# EAGLE board IOB-Adapter-Output_array (EAGLE 7.7.0)
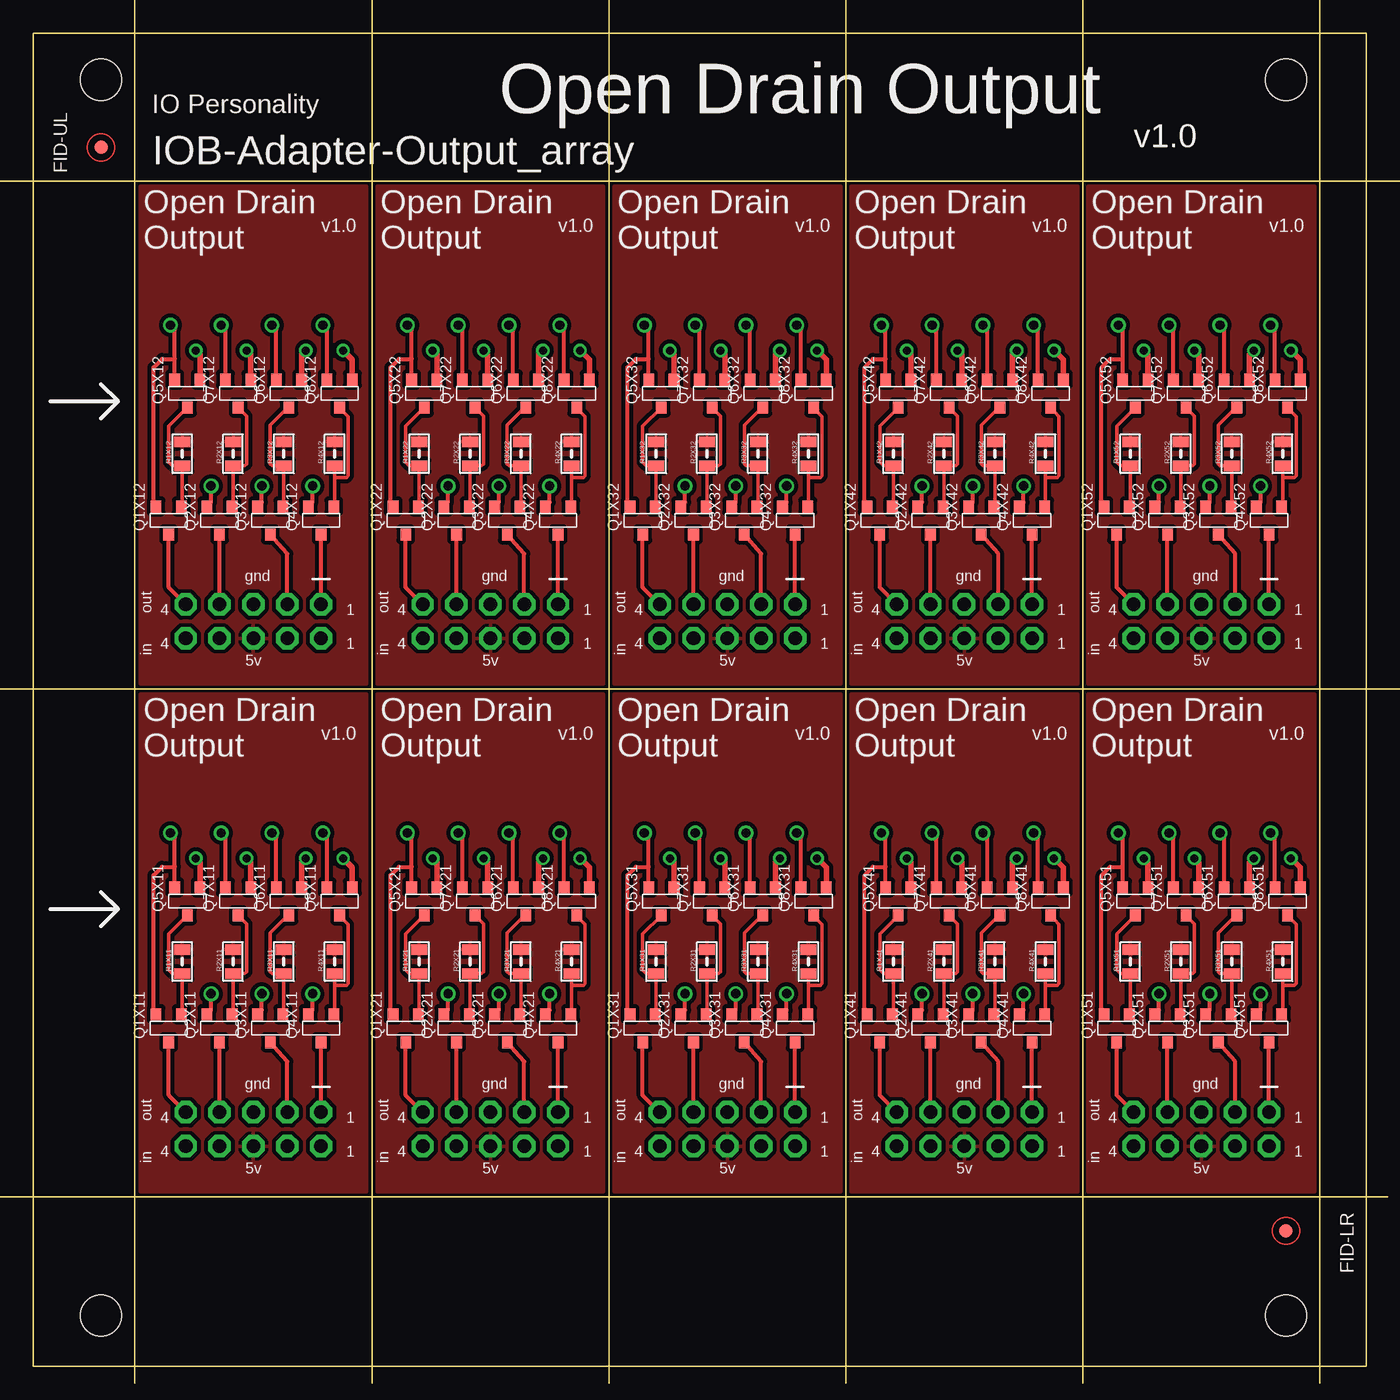
[diagram p0: board, top side]
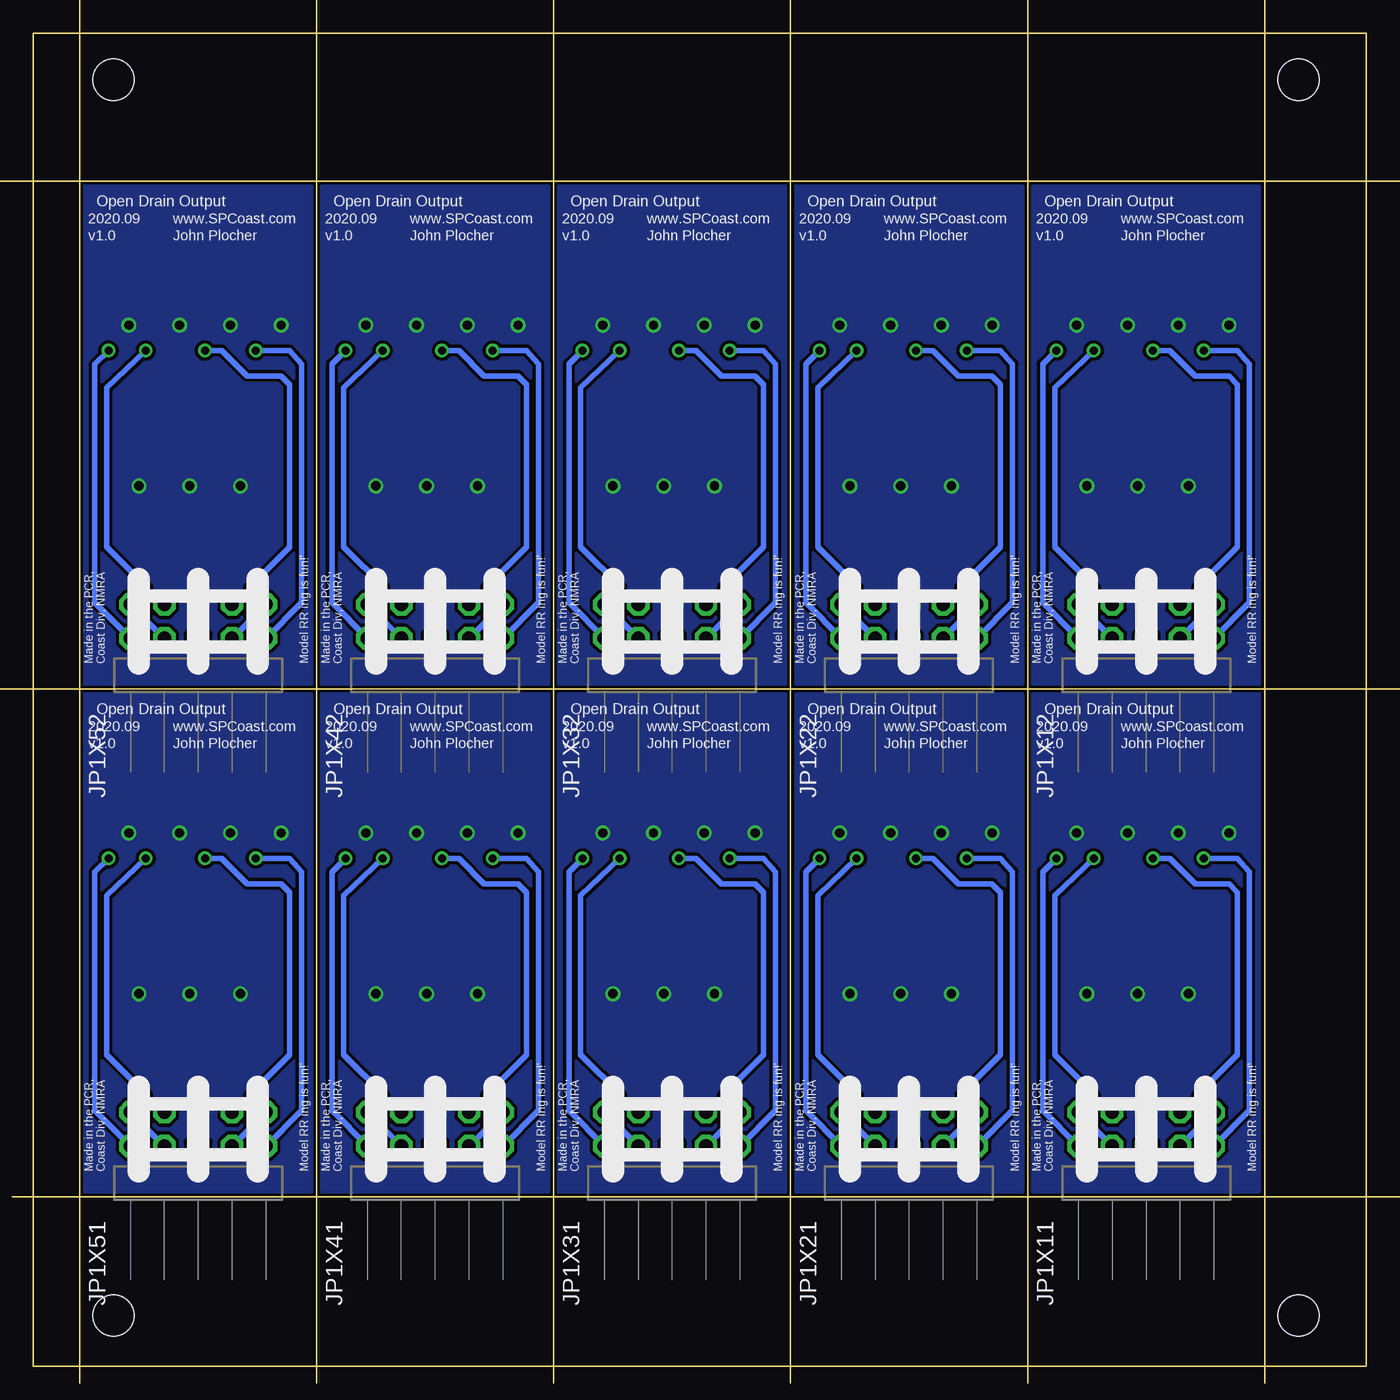
[diagram p1: board, bottom side, seen from below]

Size 100 x 100 mm. Coordinates in mm from the lower left corner, seen from the top.
Copper layers (1*16): Top 0.035mm / dielectric 1.5mm / Bottom 0.035mm
Design rules "default": minimum track width 10mil, minimum drill 0.6mm, track to track 8mil, track to pad 8mil, pad to pad 8mil, via to via 8mil, smd to smd 8mil, copper to edge 40mil, drill to drill 8mil, minimum pad ring 10mil, minimum via ring 8mil, stop-mask expansion 4mil, vias tented up to drill 0mil, thermal gap 10mil

## Footprints (pad centres in the part's own frame; a part is rotated, then mirrored left to right if it is on the bottom)
BOARD-DINRAIL-3.17IN-5X2-IOP = hole 3.1: 5.08,96.52; 93.98,96.52; 5.08,3.81; 93.98,3.81
FIDUCIAL_1MM = smd 1 x 1: 1 0,0
IOB-V3-MODULE = drill 1.016 pad 1.676 octagon: 1 -1.27,-5.08; 2 1.27,-5.08; 3 -1.27,-2.54; 4 1.27,-2.54; 5 -1.27,0; 6 1.27,0; 7 -1.27,2.54; 8 1.27,2.54; 9 -1.27,5.08; 10 1.27,5.08
SOT23-3 = smd 0.9 x 0.8: 1 1,-0.95; 2 1,0.95; 3 -1.1,0
0805-RES = smd 0.8 x 1.2: 1 -0.9,0; 2 0.9,0

## Placement (x,y rotation side)
CARRIER  BOARD  [BOARD-DINRAIL-3.17IN-5X2-IOP]  0,0 0 top
FID-LR  FIDUCIAL  [FIDUCIAL_1MM]  93.98,10.16 0 top
FID-UL  FIDUCIAL  [FIDUCIAL_1MM]  5.08,91.44 0 top
JP1X11  CONNECTOR-M05X2  [IOB-V3-MODULE]  16.51,17.78 270 bottom
JP1X12  CONNECTOR-M05X2  [IOB-V3-MODULE]  16.51,55.88 270 bottom
JP1X21  CONNECTOR-M05X2  [IOB-V3-MODULE]  34.29,17.78 270 bottom
JP1X22  CONNECTOR-M05X2  [IOB-V3-MODULE]  34.29,55.88 270 bottom
JP1X31  CONNECTOR-M05X2  [IOB-V3-MODULE]  52.07,17.78 270 bottom
JP1X32  CONNECTOR-M05X2  [IOB-V3-MODULE]  52.07,55.88 270 bottom
JP1X41  CONNECTOR-M05X2  [IOB-V3-MODULE]  69.85,17.78 270 bottom
JP1X42  CONNECTOR-M05X2  [IOB-V3-MODULE]  69.85,55.88 270 bottom
JP1X51  CONNECTOR-M05X2  [IOB-V3-MODULE]  87.63,17.78 270 bottom
JP1X52  CONNECTOR-M05X2  [IOB-V3-MODULE]  87.63,55.88 270 bottom
Q1X11  N-FET  [SOT23-3]  10.16,25.4 90 top
Q1X12  N-FET  [SOT23-3]  10.16,63.5 90 top
Q1X21  N-FET  [SOT23-3]  27.94,25.4 90 top
Q1X22  N-FET  [SOT23-3]  27.94,63.5 90 top
Q1X31  N-FET  [SOT23-3]  45.72,25.4 90 top
Q1X32  N-FET  [SOT23-3]  45.72,63.5 90 top
Q1X41  N-FET  [SOT23-3]  63.5,25.4 90 top
Q1X42  N-FET  [SOT23-3]  63.5,63.5 90 top
Q1X51  N-FET  [SOT23-3]  81.28,25.4 90 top
Q1X52  N-FET  [SOT23-3]  81.28,63.5 90 top
Q2X11  N-FET  [SOT23-3]  13.97,25.4 90 top
Q2X12  N-FET  [SOT23-3]  13.97,63.5 90 top
Q2X21  N-FET  [SOT23-3]  31.75,25.4 90 top
Q2X22  N-FET  [SOT23-3]  31.75,63.5 90 top
Q2X31  N-FET  [SOT23-3]  49.53,25.4 90 top
Q2X32  N-FET  [SOT23-3]  49.53,63.5 90 top
Q2X41  N-FET  [SOT23-3]  67.31,25.4 90 top
Q2X42  N-FET  [SOT23-3]  67.31,63.5 90 top
Q2X51  N-FET  [SOT23-3]  85.09,25.4 90 top
Q2X52  N-FET  [SOT23-3]  85.09,63.5 90 top
Q3X11  N-FET  [SOT23-3]  17.78,25.4 90 top
Q3X12  N-FET  [SOT23-3]  17.78,63.5 90 top
Q3X21  N-FET  [SOT23-3]  35.56,25.4 90 top
Q3X22  N-FET  [SOT23-3]  35.56,63.5 90 top
Q3X31  N-FET  [SOT23-3]  53.34,25.4 90 top
Q3X32  N-FET  [SOT23-3]  53.34,63.5 90 top
Q3X41  N-FET  [SOT23-3]  71.12,25.4 90 top
Q3X42  N-FET  [SOT23-3]  71.12,63.5 90 top
Q3X51  N-FET  [SOT23-3]  88.9,25.4 90 top
Q3X52  N-FET  [SOT23-3]  88.9,63.5 90 top
Q4X11  N-FET  [SOT23-3]  21.59,25.4 90 top
Q4X12  N-FET  [SOT23-3]  21.59,63.5 90 top
Q4X21  N-FET  [SOT23-3]  39.37,25.4 90 top
Q4X22  N-FET  [SOT23-3]  39.37,63.5 90 top
Q4X31  N-FET  [SOT23-3]  57.15,25.4 90 top
Q4X32  N-FET  [SOT23-3]  57.15,63.5 90 top
Q4X41  N-FET  [SOT23-3]  74.93,25.4 90 top
Q4X42  N-FET  [SOT23-3]  74.93,63.5 90 top
Q4X51  N-FET  [SOT23-3]  92.71,25.4 90 top
Q4X52  N-FET  [SOT23-3]  92.71,63.5 90 top
Q5X11  N-FET  [SOT23-3]  11.56,34.92 90 top
Q5X12  N-FET  [SOT23-3]  11.56,73.03 90 top
Q5X21  N-FET  [SOT23-3]  29.34,34.92 90 top
Q5X22  N-FET  [SOT23-3]  29.34,73.03 90 top
Q5X31  N-FET  [SOT23-3]  47.12,34.92 90 top
Q5X32  N-FET  [SOT23-3]  47.12,73.03 90 top
Q5X41  N-FET  [SOT23-3]  64.9,34.92 90 top
Q5X42  N-FET  [SOT23-3]  64.9,73.03 90 top
Q5X51  N-FET  [SOT23-3]  82.68,34.92 90 top
Q5X52  N-FET  [SOT23-3]  82.68,73.03 90 top
Q6X11  N-FET  [SOT23-3]  19.18,34.92 90 top
Q6X12  N-FET  [SOT23-3]  19.18,73.03 90 top
Q6X21  N-FET  [SOT23-3]  36.96,34.92 90 top
Q6X22  N-FET  [SOT23-3]  36.96,73.03 90 top
Q6X31  N-FET  [SOT23-3]  54.74,34.92 90 top
Q6X32  N-FET  [SOT23-3]  54.74,73.03 90 top
Q6X41  N-FET  [SOT23-3]  72.52,34.92 90 top
Q6X42  N-FET  [SOT23-3]  72.52,73.03 90 top
Q6X51  N-FET  [SOT23-3]  90.3,34.92 90 top
Q6X52  N-FET  [SOT23-3]  90.3,73.03 90 top
Q7X11  N-FET  [SOT23-3]  15.37,34.92 90 top
Q7X12  N-FET  [SOT23-3]  15.37,73.03 90 top
Q7X21  N-FET  [SOT23-3]  33.15,34.92 90 top
Q7X22  N-FET  [SOT23-3]  33.15,73.03 90 top
Q7X31  N-FET  [SOT23-3]  50.93,34.92 90 top
Q7X32  N-FET  [SOT23-3]  50.93,73.03 90 top
Q7X41  N-FET  [SOT23-3]  68.71,34.92 90 top
Q7X42  N-FET  [SOT23-3]  68.71,73.03 90 top
Q7X51  N-FET  [SOT23-3]  86.49,34.92 90 top
Q7X52  N-FET  [SOT23-3]  86.49,73.03 90 top
Q8X11  N-FET  [SOT23-3]  22.99,34.92 90 top
Q8X12  N-FET  [SOT23-3]  22.99,73.03 90 top
Q8X21  N-FET  [SOT23-3]  40.77,34.92 90 top
Q8X22  N-FET  [SOT23-3]  40.77,73.03 90 top
Q8X31  N-FET  [SOT23-3]  58.55,34.92 90 top
Q8X32  N-FET  [SOT23-3]  58.55,73.03 90 top
Q8X41  N-FET  [SOT23-3]  76.33,34.92 90 top
Q8X42  N-FET  [SOT23-3]  76.33,73.03 90 top
Q8X51  N-FET  [SOT23-3]  94.11,34.92 90 top
Q8X52  N-FET  [SOT23-3]  94.11,73.03 90 top
R1X11  10k  [0805-RES]  11.18,30.35 90 top
R1X12  10k  [0805-RES]  11.18,68.45 90 top
R1X21  10k  [0805-RES]  28.96,30.35 90 top
R1X22  10k  [0805-RES]  28.96,68.45 90 top
R1X31  10k  [0805-RES]  46.74,30.35 90 top
R1X32  10k  [0805-RES]  46.74,68.45 90 top
R1X41  10k  [0805-RES]  64.52,30.35 90 top
R1X42  10k  [0805-RES]  64.52,68.45 90 top
R1X51  10k  [0805-RES]  82.3,30.35 90 top
R1X52  10k  [0805-RES]  82.3,68.45 90 top
R2X11  10k  [0805-RES]  14.99,30.35 90 top
R2X12  10k  [0805-RES]  14.99,68.45 90 top
R2X21  10k  [0805-RES]  32.77,30.35 90 top
R2X22  10k  [0805-RES]  32.77,68.45 90 top
R2X31  10k  [0805-RES]  50.55,30.35 90 top
R2X32  10k  [0805-RES]  50.55,68.45 90 top
R2X41  10k  [0805-RES]  68.33,30.35 90 top
R2X42  10k  [0805-RES]  68.33,68.45 90 top
R2X51  10k  [0805-RES]  86.11,30.35 90 top
R2X52  10k  [0805-RES]  86.11,68.45 90 top
R3X11  10k  [0805-RES]  18.8,30.35 90 top
R3X12  10k  [0805-RES]  18.8,68.45 90 top
R3X21  10k  [0805-RES]  36.58,30.35 90 top
R3X22  10k  [0805-RES]  36.58,68.45 90 top
R3X31  10k  [0805-RES]  54.36,30.35 90 top
R3X32  10k  [0805-RES]  54.36,68.45 90 top
R3X41  10k  [0805-RES]  72.14,30.35 90 top
R3X42  10k  [0805-RES]  72.14,68.45 90 top
R3X51  10k  [0805-RES]  89.92,30.35 90 top
R3X52  10k  [0805-RES]  89.92,68.45 90 top
R4X11  10k  [0805-RES]  22.61,30.35 90 top
R4X12  10k  [0805-RES]  22.61,68.45 90 top
R4X21  10k  [0805-RES]  40.39,30.35 90 top
R4X22  10k  [0805-RES]  40.39,68.45 90 top
R4X31  10k  [0805-RES]  58.17,30.35 90 top
R4X32  10k  [0805-RES]  58.17,68.45 90 top
R4X41  10k  [0805-RES]  75.95,30.35 90 top
R4X42  10k  [0805-RES]  75.95,68.45 90 top
R4X51  10k  [0805-RES]  93.73,30.35 90 top
R4X52  10k  [0805-RES]  93.73,68.45 90 top

## Library data of the parts
CARRIER FID-LR FID-UL JP1X11 JP1X12 JP1X21 JP1X22 JP1X31 JP1X32 JP1X41 JP1X42 JP1X51 JP1X52 Q1X11 Q1X12 Q1X21 Q1X22 Q1X31 Q1X32 Q1X41 Q1X42 Q1X51 Q1X52 Q2X11 Q2X12 Q2X21 Q2X22 Q2X31 Q2X32 Q2X41 Q2X42 Q2X51 Q2X52 Q3X11 Q3X12 Q3X21 Q3X22 Q3X31 Q3X32 Q3X41 Q3X42 Q3X51 Q3X52 Q4X11 Q4X12 Q4X21 Q4X22 Q4X31 Q4X32 Q4X41 Q4X42 Q4X51 Q4X52 Q5X11 Q5X12 Q5X21 Q5X22 Q5X31 Q5X32 Q5X41 Q5X42 Q5X51 Q5X52 Q6X11 Q6X12 Q6X21 Q6X22 Q6X31 Q6X32 Q6X41 Q6X42 Q6X51 Q6X52 Q7X11 Q7X12 Q7X21 Q7X22 Q7X31 Q7X32 Q7X41 Q7X42 Q7X51 Q7X52 Q8X11 Q8X12 Q8X21 Q8X22 Q8X31 Q8X32 Q8X41 Q8X42 Q8X51 Q8X52 R1X11 R1X12 R1X21 R1X22 R1X31 R1X32 R1X41 R1X42 R1X51 R1X52 R2X11 R2X12 R2X21 R2X22 R2X31 R2X32 R2X41 R2X42 R2X51 R2X52 R3X11 R3X12 R3X21 R3X22 R3X31 R3X32 R3X41 R3X42 R3X51 R3X52 R4X11 R4X12 R4X21 R4X22 R4X31 R4X32 R4X41 R4X42 R4X51 R4X52 = SPCoast

## Nets
GNDX11: JP1X11.5 Q1X11.2 Q2X11.2 Q3X11.2 Q4X11.2 Q5X11.2 Q6X11.2 Q7X11.2 Q8X11.2
GNDX12: JP1X12.5 Q1X12.2 Q2X12.2 Q3X12.2 Q4X12.2 Q5X12.2 Q6X12.2 Q7X12.2 Q8X12.2
GNDX21: JP1X21.5 Q1X21.2 Q2X21.2 Q3X21.2 Q4X21.2 Q5X21.2 Q6X21.2 Q7X21.2 Q8X21.2
GNDX22: JP1X22.5 Q1X22.2 Q2X22.2 Q3X22.2 Q4X22.2 Q5X22.2 Q6X22.2 Q7X22.2 Q8X22.2
GNDX31: JP1X31.5 Q1X31.2 Q2X31.2 Q3X31.2 Q4X31.2 Q5X31.2 Q6X31.2 Q7X31.2 Q8X31.2
GNDX32: JP1X32.5 Q1X32.2 Q2X32.2 Q3X32.2 Q4X32.2 Q5X32.2 Q6X32.2 Q7X32.2 Q8X32.2
GNDX41: JP1X41.5 Q1X41.2 Q2X41.2 Q3X41.2 Q4X41.2 Q5X41.2 Q6X41.2 Q7X41.2 Q8X41.2
GNDX42: JP1X42.5 Q1X42.2 Q2X42.2 Q3X42.2 Q4X42.2 Q5X42.2 Q6X42.2 Q7X42.2 Q8X42.2
GNDX51: JP1X51.5 Q1X51.2 Q2X51.2 Q3X51.2 Q4X51.2 Q5X51.2 Q6X51.2 Q7X51.2 Q8X51.2
GNDX52: JP1X52.5 Q1X52.2 Q2X52.2 Q3X52.2 Q4X52.2 Q5X52.2 Q6X52.2 Q7X52.2 Q8X52.2
IO1X11: JP1X11.1 Q4X11.3
IO1X12: JP1X12.1 Q4X12.3
IO1X21: JP1X21.1 Q4X21.3
IO1X22: JP1X22.1 Q4X22.3
IO1X31: JP1X31.1 Q4X31.3
IO1X32: JP1X32.1 Q4X32.3
IO1X41: JP1X41.1 Q4X41.3
IO1X42: JP1X42.1 Q4X42.3
IO1X51: JP1X51.1 Q4X51.3
IO1X52: JP1X52.1 Q4X52.3
IO2X11: JP1X11.3 Q3X11.3
IO2X12: JP1X12.3 Q3X12.3
IO2X21: JP1X21.3 Q3X21.3
IO2X22: JP1X22.3 Q3X22.3
IO2X31: JP1X31.3 Q3X31.3
IO2X32: JP1X32.3 Q3X32.3
IO2X41: JP1X41.3 Q3X41.3
IO2X42: JP1X42.3 Q3X42.3
IO2X51: JP1X51.3 Q3X51.3
IO2X52: JP1X52.3 Q3X52.3
IO3X11: JP1X11.7 Q2X11.3
IO3X12: JP1X12.7 Q2X12.3
IO3X21: JP1X21.7 Q2X21.3
IO3X22: JP1X22.7 Q2X22.3
IO3X31: JP1X31.7 Q2X31.3
IO3X32: JP1X32.7 Q2X32.3
IO3X41: JP1X41.7 Q2X41.3
IO3X42: JP1X42.7 Q2X42.3
IO3X51: JP1X51.7 Q2X51.3
IO3X52: JP1X52.7 Q2X52.3
IO4X11: JP1X11.9 Q1X11.3
IO4X12: JP1X12.9 Q1X12.3
IO4X21: JP1X21.9 Q1X21.3
IO4X22: JP1X22.9 Q1X22.3
IO4X31: JP1X31.9 Q1X31.3
IO4X32: JP1X32.9 Q1X32.3
IO4X41: JP1X41.9 Q1X41.3
IO4X42: JP1X42.9 Q1X42.3
IO4X51: JP1X51.9 Q1X51.3
IO4X52: JP1X52.9 Q1X52.3
N$1X11: Q4X11.1 Q8X11.3 R4X11.1
N$1X12: Q4X12.1 Q8X12.3 R4X12.1
N$1X21: Q4X21.1 Q8X21.3 R4X21.1
N$1X22: Q4X22.1 Q8X22.3 R4X22.1
N$1X31: Q4X31.1 Q8X31.3 R4X31.1
N$1X32: Q4X32.1 Q8X32.3 R4X32.1
N$1X41: Q4X41.1 Q8X41.3 R4X41.1
N$1X42: Q4X42.1 Q8X42.3 R4X42.1
N$1X51: Q4X51.1 Q8X51.3 R4X51.1
N$1X52: Q4X52.1 Q8X52.3 R4X52.1
N$6X11: Q3X11.1 Q6X11.3 R3X11.1
N$6X12: Q3X12.1 Q6X12.3 R3X12.1
N$6X21: Q3X21.1 Q6X21.3 R3X21.1
N$6X22: Q3X22.1 Q6X22.3 R3X22.1
N$6X31: Q3X31.1 Q6X31.3 R3X31.1
N$6X32: Q3X32.1 Q6X32.3 R3X32.1
N$6X41: Q3X41.1 Q6X41.3 R3X41.1
N$6X42: Q3X42.1 Q6X42.3 R3X42.1
N$6X51: Q3X51.1 Q6X51.3 R3X51.1
N$6X52: Q3X52.1 Q6X52.3 R3X52.1
N$7X11: Q2X11.1 Q7X11.3 R2X11.1
N$7X12: Q2X12.1 Q7X12.3 R2X12.1
N$7X21: Q2X21.1 Q7X21.3 R2X21.1
N$7X22: Q2X22.1 Q7X22.3 R2X22.1
N$7X31: Q2X31.1 Q7X31.3 R2X31.1
N$7X32: Q2X32.1 Q7X32.3 R2X32.1
N$7X41: Q2X41.1 Q7X41.3 R2X41.1
N$7X42: Q2X42.1 Q7X42.3 R2X42.1
N$7X51: Q2X51.1 Q7X51.3 R2X51.1
N$7X52: Q2X52.1 Q7X52.3 R2X52.1
N$8X11: Q1X11.1 Q5X11.3 R1X11.1
N$8X12: Q1X12.1 Q5X12.3 R1X12.1
N$8X21: Q1X21.1 Q5X21.3 R1X21.1
N$8X22: Q1X22.1 Q5X22.3 R1X22.1
N$8X31: Q1X31.1 Q5X31.3 R1X31.1
N$8X32: Q1X32.1 Q5X32.3 R1X32.1
N$8X41: Q1X41.1 Q5X41.3 R1X41.1
N$8X42: Q1X42.1 Q5X42.3 R1X42.1
N$8X51: Q1X51.1 Q5X51.3 R1X51.1
N$8X52: Q1X52.1 Q5X52.3 R1X52.1
P1X11: JP1X11.2 Q8X11.1
P1X12: JP1X12.2 Q8X12.1
P1X21: JP1X21.2 Q8X21.1
P1X22: JP1X22.2 Q8X22.1
P1X31: JP1X31.2 Q8X31.1
P1X32: JP1X32.2 Q8X32.1
P1X41: JP1X41.2 Q8X41.1
P1X42: JP1X42.2 Q8X42.1
P1X51: JP1X51.2 Q8X51.1
P1X52: JP1X52.2 Q8X52.1
P2X11: JP1X11.4 Q6X11.1
P2X12: JP1X12.4 Q6X12.1
P2X21: JP1X21.4 Q6X21.1
P2X22: JP1X22.4 Q6X22.1
P2X31: JP1X31.4 Q6X31.1
P2X32: JP1X32.4 Q6X32.1
P2X41: JP1X41.4 Q6X41.1
P2X42: JP1X42.4 Q6X42.1
P2X51: JP1X51.4 Q6X51.1
P2X52: JP1X52.4 Q6X52.1
P3X11: JP1X11.8 Q7X11.1
P3X12: JP1X12.8 Q7X12.1
P3X21: JP1X21.8 Q7X21.1
P3X22: JP1X22.8 Q7X22.1
P3X31: JP1X31.8 Q7X31.1
P3X32: JP1X32.8 Q7X32.1
P3X41: JP1X41.8 Q7X41.1
P3X42: JP1X42.8 Q7X42.1
P3X51: JP1X51.8 Q7X51.1
P3X52: JP1X52.8 Q7X52.1
P4X11: JP1X11.10 Q5X11.1
P4X12: JP1X12.10 Q5X12.1
P4X21: JP1X21.10 Q5X21.1
P4X22: JP1X22.10 Q5X22.1
P4X31: JP1X31.10 Q5X31.1
P4X32: JP1X32.10 Q5X32.1
P4X41: JP1X41.10 Q5X41.1
P4X42: JP1X42.10 Q5X42.1
P4X51: JP1X51.10 Q5X51.1
P4X52: JP1X52.10 Q5X52.1
VCCX11: JP1X11.6 R1X11.2 R2X11.2 R3X11.2 R4X11.2
VCCX12: JP1X12.6 R1X12.2 R2X12.2 R3X12.2 R4X12.2
VCCX21: JP1X21.6 R1X21.2 R2X21.2 R3X21.2 R4X21.2
VCCX22: JP1X22.6 R1X22.2 R2X22.2 R3X22.2 R4X22.2
VCCX31: JP1X31.6 R1X31.2 R2X31.2 R3X31.2 R4X31.2
VCCX32: JP1X32.6 R1X32.2 R2X32.2 R3X32.2 R4X32.2
VCCX41: JP1X41.6 R1X41.2 R2X41.2 R3X41.2 R4X41.2
VCCX42: JP1X42.6 R1X42.2 R2X42.2 R3X42.2 R4X42.2
VCCX51: JP1X51.6 R1X51.2 R2X51.2 R3X51.2 R4X51.2
VCCX52: JP1X52.6 R1X52.2 R2X52.2 R3X52.2 R4X52.2

## Tracks (layer width: path | path; a pad name or v marks a point on that pad's centre or on a via)
GNDX11  (via drill 0.7 pad 1.11)
  Top 0.305: Q5X11.2 10.61,37.47 | 10.61,37.47 10.61,39.69 v10.29,40.01 | Q7X11.2 14.42,39.69 v14.1,40.01 | Q6X11.2 18.23,39.69 v17.91,40.01 | Q8X11.2 22.04,39.69 v21.72,40.01 | Q1X11.2 9.02,26.84 9.02,36.83 9.65,37.47 10.61,37.47 | Q2X11.2 13.34,26.71 v13.34,27.94 | Q3X11.2 17.14,26.71 v17.14,27.94 | Q4X11.2 20.95,26.71 v20.95,27.94
  Top 0.406: Q3X11.2 16.83,26.36 | Q2X11.2 13.02,26.36 | Q1X11.2 9.21,26.36
  pour Bottom (isolate 0.254, no thermals): 8,13.08 8,50.42 25.02,50.42 25.02,13.08
GNDX12  (via drill 0.7 pad 1.11)
  Top 0.305: Q5X12.2 10.61,75.56 | 10.61,75.56 10.61,77.78 v10.29,78.11 | Q7X12.2 14.42,77.78 v14.1,78.11 | Q6X12.2 18.23,77.78 v17.91,78.11 | Q8X12.2 22.04,77.79 v21.72,78.11 | Q1X12.2 9.02,64.94 9.02,74.93 9.65,75.56 10.61,75.56 | Q2X12.2 13.34,64.81 v13.34,66.04 | Q3X12.2 17.14,64.81 v17.14,66.04 | Q4X12.2 20.95,64.81 v20.95,66.04
  Top 0.406: Q3X12.2 16.83,64.45 | Q2X12.2 13.02,64.45 | Q1X12.2 9.21,64.45
  pour Bottom (isolate 0.254, no thermals): 8,51.18 8,88.52 25.02,88.52 25.02,51.18
GNDX21  (via drill 0.7 pad 1.11)
  Top 0.305: Q5X21.2 28.39,37.47 | 28.39,37.47 28.39,39.69 v28.07,40.01 | Q7X21.2 32.2,39.69 v31.88,40.01 | Q6X21.2 36.01,39.69 v35.69,40.01 | Q8X21.2 39.82,39.69 v39.5,40.01 | Q1X21.2 26.8,26.84 26.8,36.83 27.43,37.47 28.39,37.47 | Q2X21.2 31.11,26.71 v31.11,27.94 | Q3X21.2 34.92,26.71 v34.92,27.94 | Q4X21.2 38.73,26.71 v38.73,27.94
  Top 0.406: Q3X21.2 34.61,26.36 | Q2X21.2 30.8,26.36 | Q1X21.2 26.99,26.36
  pour Bottom (isolate 0.254, no thermals): 25.78,13.08 25.78,50.42 42.8,50.42 42.8,13.08
GNDX22  (via drill 0.7 pad 1.11)
  Top 0.305: Q5X22.2 28.39,75.56 | 28.39,75.56 28.39,77.78 v28.07,78.11 | Q7X22.2 32.2,77.78 v31.88,78.11 | Q6X22.2 36.01,77.78 v35.69,78.11 | Q8X22.2 39.82,77.79 v39.5,78.11 | Q1X22.2 26.8,64.94 26.8,74.93 27.43,75.56 28.39,75.56 | Q2X22.2 31.11,64.81 v31.11,66.04 | Q3X22.2 34.92,64.81 v34.92,66.04 | Q4X22.2 38.73,64.81 v38.73,66.04
  Top 0.406: Q3X22.2 34.61,64.45 | Q2X22.2 30.8,64.45 | Q1X22.2 26.99,64.45
  pour Bottom (isolate 0.254, no thermals): 25.78,51.18 25.78,88.52 42.8,88.52 42.8,51.18
GNDX31  (via drill 0.7 pad 1.11)
  Top 0.305: Q5X31.2 46.17,37.47 | 46.17,37.47 46.17,39.69 v45.85,40.01 | Q7X31.2 49.98,39.69 v49.66,40.01 | Q6X31.2 53.79,39.69 v53.47,40.01 | Q8X31.2 57.6,39.69 v57.28,40.01 | Q1X31.2 44.58,26.84 44.58,36.83 45.21,37.47 46.17,37.47 | Q2X31.2 48.9,26.71 v48.9,27.94 | Q3X31.2 52.7,26.71 v52.7,27.94 | Q4X31.2 56.52,26.71 v56.52,27.94
  Top 0.406: Q3X31.2 52.39,26.36 | Q2X31.2 48.58,26.36 | Q1X31.2 44.77,26.36
  pour Bottom (isolate 0.254, no thermals): 43.56,13.08 43.56,50.42 60.58,50.42 60.58,13.08
GNDX32  (via drill 0.7 pad 1.11)
  Top 0.305: Q5X32.2 46.17,75.56 | 46.17,75.56 46.17,77.78 v45.85,78.11 | Q7X32.2 49.98,77.78 v49.66,78.11 | Q6X32.2 53.79,77.78 v53.47,78.11 | Q8X32.2 57.6,77.79 v57.28,78.11 | Q1X32.2 44.58,64.94 44.58,74.93 45.21,75.56 46.17,75.56 | Q2X32.2 48.9,64.81 v48.9,66.04 | Q3X32.2 52.7,64.81 v52.7,66.04 | Q4X32.2 56.52,64.81 v56.52,66.04
  Top 0.406: Q3X32.2 52.39,64.45 | Q2X32.2 48.58,64.45 | Q1X32.2 44.77,64.45
  pour Bottom (isolate 0.254, no thermals): 43.56,51.18 43.56,88.52 60.58,88.52 60.58,51.18
GNDX41  (via drill 0.7 pad 1.11)
  Top 0.305: Q5X41.2 63.95,37.47 | 63.95,37.47 63.95,39.69 v63.63,40.01 | Q7X41.2 67.76,39.69 v67.44,40.01 | Q6X41.2 71.57,39.69 v71.25,40.01 | Q8X41.2 75.38,39.69 v75.06,40.01 | Q1X41.2 62.36,26.84 62.36,36.83 62.99,37.47 63.95,37.47 | Q2X41.2 66.67,26.71 v66.67,27.94 | Q3X41.2 70.48,26.71 v70.48,27.94 | Q4X41.2 74.3,26.71 v74.3,27.94
  Top 0.406: Q3X41.2 70.17,26.36 | Q2X41.2 66.36,26.36 | Q1X41.2 62.55,26.36
  pour Bottom (isolate 0.254, no thermals): 61.34,13.08 61.34,50.42 78.36,50.42 78.36,13.08
GNDX42  (via drill 0.7 pad 1.11)
  Top 0.305: Q5X42.2 63.95,75.56 | 63.95,75.56 63.95,77.78 v63.63,78.11 | Q7X42.2 67.76,77.78 v67.44,78.11 | Q6X42.2 71.57,77.78 v71.25,78.11 | Q8X42.2 75.38,77.79 v75.06,78.11 | Q1X42.2 62.36,64.94 62.36,74.93 62.99,75.56 63.95,75.56 | Q2X42.2 66.67,64.81 v66.67,66.04 | Q3X42.2 70.48,64.81 v70.48,66.04 | Q4X42.2 74.3,64.81 v74.3,66.04
  Top 0.406: Q3X42.2 70.17,64.45 | Q2X42.2 66.36,64.45 | Q1X42.2 62.55,64.45
  pour Bottom (isolate 0.254, no thermals): 61.34,51.18 61.34,88.52 78.36,88.52 78.36,51.18
GNDX51  (via drill 0.7 pad 1.11)
  Top 0.305: Q5X51.2 81.73,37.47 | 81.73,37.47 81.73,39.69 v81.41,40.01 | Q7X51.2 85.54,39.69 v85.22,40.01 | Q6X51.2 89.35,39.69 v89.03,40.01 | Q8X51.2 93.16,39.69 v92.84,40.01 | Q1X51.2 80.14,26.84 80.14,36.83 80.77,37.47 81.73,37.47 | Q2X51.2 84.45,26.71 v84.45,27.94 | Q3X51.2 88.27,26.71 v88.27,27.94 | Q4X51.2 92.08,26.71 v92.08,27.94
  Top 0.406: Q3X51.2 87.95,26.36 | Q2X51.2 84.14,26.36 | Q1X51.2 80.33,26.36
  pour Bottom (isolate 0.254, no thermals): 79.12,13.08 79.12,50.42 96.14,50.42 96.14,13.08
GNDX52  (via drill 0.7 pad 1.11)
  Top 0.305: Q5X52.2 81.73,75.56 | 81.73,75.56 81.73,77.78 v81.41,78.11 | Q7X52.2 85.54,77.78 v85.22,78.11 | Q6X52.2 89.35,77.78 v89.03,78.11 | Q8X52.2 93.16,77.79 v92.84,78.11 | Q1X52.2 80.14,64.94 80.14,74.93 80.77,75.56 81.73,75.56 | Q2X52.2 84.45,64.81 v84.45,66.04 | Q3X52.2 88.27,64.81 v88.27,66.04 | Q4X52.2 92.08,64.81 v92.08,66.04
  Top 0.406: Q3X52.2 87.95,64.45 | Q2X52.2 84.14,64.45 | Q1X52.2 80.33,64.45
  pour Bottom (isolate 0.254, no thermals): 79.12,51.18 79.12,88.52 96.14,88.52 96.14,51.18
IO1X11
  Top 0.305: JP1X11.1 Q4X11.3
IO1X12
  Top 0.305: JP1X12.1 Q4X12.3
IO1X21
  Top 0.305: JP1X21.1 Q4X21.3
IO1X22
  Top 0.305: JP1X22.1 Q4X22.3
IO1X31
  Top 0.305: JP1X31.1 Q4X31.3
IO1X32
  Top 0.305: JP1X32.1 Q4X32.3
IO1X41
  Top 0.305: JP1X41.1 Q4X41.3
IO1X42
  Top 0.305: JP1X42.1 Q4X42.3
IO1X51
  Top 0.305: JP1X51.1 Q4X51.3
IO1X52
  Top 0.305: JP1X52.1 Q4X52.3
IO2X11
  Top 0.305: JP1X11.3 19.05,22.86 Q3X11.3
IO2X12
  Top 0.305: JP1X12.3 19.05,60.96 Q3X12.3
IO2X21
  Top 0.305: JP1X21.3 36.83,22.86 Q3X21.3
IO2X22
  Top 0.305: JP1X22.3 36.83,60.96 Q3X22.3
IO2X31
  Top 0.305: JP1X31.3 54.61,22.86 Q3X31.3
IO2X32
  Top 0.305: JP1X32.3 54.61,60.96 Q3X32.3
IO2X41
  Top 0.305: JP1X41.3 72.39,22.86 Q3X41.3
IO2X42
  Top 0.305: JP1X42.3 72.39,60.96 Q3X42.3
IO2X51
  Top 0.305: JP1X51.3 90.17,22.86 Q3X51.3
IO2X52
  Top 0.305: JP1X52.3 90.17,60.96 Q3X52.3
IO3X11
  Top 0.305: JP1X11.7 Q2X11.3
IO3X12
  Top 0.305: JP1X12.7 Q2X12.3
IO3X21
  Top 0.305: JP1X21.7 Q2X21.3
IO3X22
  Top 0.305: JP1X22.7 Q2X22.3
IO3X31
  Top 0.305: JP1X31.7 Q2X31.3
IO3X32
  Top 0.305: JP1X32.7 Q2X32.3
IO3X41
  Top 0.305: JP1X41.7 Q2X41.3
IO3X42
  Top 0.305: JP1X42.7 Q2X42.3
IO3X51
  Top 0.305: JP1X51.7 Q2X51.3
IO3X52
  Top 0.305: JP1X52.7 Q2X52.3
IO4X11
  Top 0.305: JP1X11.9 10.16,20.32 Q1X11.3
IO4X12
  Top 0.305: JP1X12.9 10.16,58.42 Q1X12.3
IO4X21
  Top 0.305: JP1X21.9 27.94,20.32 Q1X21.3
IO4X22
  Top 0.305: JP1X22.9 27.94,58.42 Q1X22.3
IO4X31
  Top 0.305: JP1X31.9 45.72,20.32 Q1X31.3
IO4X32
  Top 0.305: JP1X32.9 45.72,58.42 Q1X32.3
IO4X41
  Top 0.305: JP1X41.9 63.5,20.32 Q1X41.3
IO4X42
  Top 0.305: JP1X42.9 63.5,58.42 Q1X42.3
IO4X51
  Top 0.305: JP1X51.9 81.28,20.32 Q1X51.3
IO4X52
  Top 0.305: JP1X52.9 81.28,58.42 Q1X52.3
N$1X11
  Top 0.254: Q4X11.1 22.61,26.47 22.61,28.57 | 22.61,28.57 R4X11.1 | Q8X11.3 23.62,33.15 23.62,28.7 23.5,28.57 22.61,28.57
N$1X12
  Top 0.254: Q4X12.1 22.61,64.57 22.61,66.67 | 22.61,66.67 R4X12.1 | Q8X12.3 23.62,71.25 23.62,66.8 23.5,66.67 22.61,66.67
N$1X21
  Top 0.254: Q4X21.1 40.39,26.47 40.39,28.57 | 40.39,28.57 R4X21.1 | Q8X21.3 41.4,33.15 41.4,28.7 41.27,28.57 40.39,28.57
N$1X22
  Top 0.254: Q4X22.1 40.39,64.57 40.39,66.67 | 40.39,66.67 R4X22.1 | Q8X22.3 41.4,71.25 41.4,66.8 41.27,66.67 40.39,66.67
N$1X31
  Top 0.254: Q4X31.1 58.17,26.47 58.17,28.57 | 58.17,28.57 R4X31.1 | Q8X31.3 59.18,33.15 59.18,28.7 59.05,28.57 58.17,28.57
N$1X32
  Top 0.254: Q4X32.1 58.17,64.57 58.17,66.67 | 58.17,66.67 R4X32.1 | Q8X32.3 59.18,71.25 59.18,66.8 59.05,66.67 58.17,66.67
N$1X41
  Top 0.254: Q4X41.1 75.95,26.47 75.95,28.57 | 75.95,28.57 R4X41.1 | Q8X41.3 76.96,33.15 76.96,28.7 76.83,28.57 75.95,28.57
N$1X42
  Top 0.254: Q4X42.1 75.95,64.57 75.95,66.67 | 75.95,66.67 R4X42.1 | Q8X42.3 76.96,71.25 76.96,66.8 76.83,66.67 75.95,66.67
N$1X51
  Top 0.254: Q4X51.1 93.73,26.47 93.73,28.57 | 93.73,28.57 R4X51.1 | Q8X51.3 94.74,33.15 94.74,28.7 94.61,28.57 93.73,28.57
N$1X52
  Top 0.254: Q4X52.1 93.73,64.57 93.73,66.67 | 93.73,66.67 R4X52.1 | Q8X52.3 94.74,71.25 94.74,66.8 94.61,66.67 93.73,66.67
N$6X11
  Top 0.254: Q3X11.1 18.8,26.47 R3X11.1 18.91,29.46 17.91,29.46 17.78,29.59 17.78,32.51 19.09,33.83 Q6X11.3
N$6X12
  Top 0.254: Q3X12.1 18.8,64.57 R3X12.1 18.91,67.56 17.91,67.56 17.78,67.69 17.78,70.61 19.09,71.92 Q6X12.3
N$6X21
  Top 0.254: Q3X21.1 36.58,26.47 R3X21.1 36.69,29.46 35.69,29.46 35.56,29.59 35.56,32.51 36.87,33.83 Q6X21.3
N$6X22
  Top 0.254: Q3X22.1 36.58,64.57 R3X22.1 36.69,67.56 35.69,67.56 35.56,67.69 35.56,70.61 36.87,71.92 Q6X22.3
N$6X31
  Top 0.254: Q3X31.1 54.36,26.47 R3X31.1 54.47,29.46 53.47,29.46 53.34,29.59 53.34,32.51 54.65,33.83 Q6X31.3
N$6X32
  Top 0.254: Q3X32.1 54.36,64.57 R3X32.1 54.47,67.56 53.47,67.56 53.34,67.69 53.34,70.61 54.65,71.92 Q6X32.3
N$6X41
  Top 0.254: Q3X41.1 72.14,26.47 R3X41.1 72.25,29.46 71.25,29.46 71.12,29.59 71.12,32.51 72.43,33.83 Q6X41.3
N$6X42
  Top 0.254: Q3X42.1 72.14,64.57 R3X42.1 72.25,67.56 71.25,67.56 71.12,67.69 71.12,70.61 72.43,71.92 Q6X42.3
N$6X51
  Top 0.254: Q3X51.1 89.92,26.47 R3X51.1 90.03,29.46 89.03,29.46 88.9,29.59 88.9,32.51 90.21,33.83 Q6X51.3
N$6X52
  Top 0.254: Q3X52.1 89.92,64.57 R3X52.1 90.03,67.56 89.03,67.56 88.9,67.69 88.9,70.61 90.21,71.92 Q6X52.3
N$7X11
  Top 0.254: Q2X11.1 14.99,26.47 R2X11.1 15.86,29.45 16,29.59 16,33.19 Q7X11.3
N$7X12
  Top 0.254: Q2X12.1 14.99,64.57 R2X12.1 15.86,67.55 16,67.69 16,71.29 Q7X12.3
N$7X21
  Top 0.254: Q2X21.1 32.77,26.47 R2X21.1 33.64,29.45 33.78,29.59 33.78,33.19 Q7X21.3
N$7X22
  Top 0.254: Q2X22.1 32.77,64.57 R2X22.1 33.64,67.55 33.78,67.69 33.78,71.29 Q7X22.3
N$7X31
  Top 0.254: Q2X31.1 50.55,26.47 R2X31.1 51.42,29.45 51.56,29.59 51.56,33.19 Q7X31.3
N$7X32
  Top 0.254: Q2X32.1 50.55,64.57 R2X32.1 51.42,67.55 51.56,67.69 51.56,71.29 Q7X32.3
N$7X41
  Top 0.254: Q2X41.1 68.33,26.47 R2X41.1 69.2,29.45 69.34,29.59 69.34,33.19 Q7X41.3
N$7X42
  Top 0.254: Q2X42.1 68.33,64.57 R2X42.1 69.2,67.55 69.34,67.69 69.34,71.29 Q7X42.3
N$7X51
  Top 0.254: Q2X51.1 86.11,26.47 R2X51.1 86.98,29.45 87.12,29.59 87.12,33.19 Q7X51.3
N$7X52
  Top 0.254: Q2X52.1 86.11,64.57 R2X52.1 86.98,67.55 87.12,67.69 87.12,71.29 Q7X52.3
N$8X11
  Top 0.254: Q1X11.1 11.18,26.47 R1X11.1 10.43,29.45 10.16,29.72 10.16,32.43 Q5X11.3
N$8X12
  Top 0.254: Q1X12.1 11.18,64.57 R1X12.1 10.43,67.55 10.16,67.82 10.16,70.53 Q5X12.3
N$8X21
  Top 0.254: Q1X21.1 28.96,26.47 R1X21.1 28.2,29.45 27.94,29.72 27.94,32.43 Q5X21.3
N$8X22
  Top 0.254: Q1X22.1 28.96,64.57 R1X22.1 28.2,67.55 27.94,67.82 27.94,70.53 Q5X22.3
N$8X31
  Top 0.254: Q1X31.1 46.74,26.47 R1X31.1 45.98,29.45 45.72,29.72 45.72,32.43 Q5X31.3
N$8X32
  Top 0.254: Q1X32.1 46.74,64.57 R1X32.1 45.98,67.55 45.72,67.82 45.72,70.53 Q5X32.3
N$8X41
  Top 0.254: Q1X41.1 64.52,26.47 R1X41.1 63.77,29.45 63.5,29.72 63.5,32.43 Q5X41.3
N$8X42
  Top 0.254: Q1X42.1 64.52,64.57 R1X42.1 63.77,67.55 63.5,67.82 63.5,70.53 Q5X42.3
N$8X51
  Top 0.254: Q1X51.1 82.3,26.47 R1X51.1 81.55,29.45 81.28,29.72 81.28,32.43 Q5X51.3
N$8X52
  Top 0.254: Q1X52.1 82.3,64.57 R1X52.1 81.55,67.55 81.28,67.82 81.28,70.53 Q5X52.3
P1X11  (via drill 0.6 pad 1.01)
  Top 0.406: v23.24,38.1 23.94,37.4 Q8X11.1
  Bottom 0.406: JP1X11.2 24.26,19.18 24.26,37.08 v23.24,38.1
P1X12  (via drill 0.6 pad 1.01)
  Top 0.406: v23.24,76.2 23.94,75.5 Q8X12.1
  Bottom 0.406: JP1X12.2 24.26,57.28 24.26,75.18 v23.24,76.2
P1X21  (via drill 0.6 pad 1.01)
  Top 0.406: v41.02,38.1 41.72,37.4 Q8X21.1
  Bottom 0.406: JP1X21.2 42.04,19.18 42.04,37.08 v41.02,38.1
P1X22  (via drill 0.6 pad 1.01)
  Top 0.406: v41.02,76.2 41.72,75.5 Q8X22.1
  Bottom 0.406: JP1X22.2 42.04,57.28 42.04,75.18 v41.02,76.2
P1X31  (via drill 0.6 pad 1.01)
  Top 0.406: v58.8,38.1 59.5,37.4 Q8X31.1
  Bottom 0.406: JP1X31.2 59.82,19.18 59.82,37.08 v58.8,38.1
P1X32  (via drill 0.6 pad 1.01)
  Top 0.406: v58.8,76.2 59.5,75.5 Q8X32.1
  Bottom 0.406: JP1X32.2 59.82,57.28 59.82,75.18 v58.8,76.2
P1X41  (via drill 0.6 pad 1.01)
  Top 0.406: v76.58,38.1 77.28,37.4 Q8X41.1
  Bottom 0.406: JP1X41.2 77.6,19.18 77.6,37.08 v76.58,38.1
P1X42  (via drill 0.6 pad 1.01)
  Top 0.406: v76.58,76.2 77.28,75.5 Q8X42.1
  Bottom 0.406: JP1X42.2 77.6,57.28 77.6,75.18 v76.58,76.2
P1X51  (via drill 0.6 pad 1.01)
  Top 0.406: v94.36,38.1 95.06,37.4 Q8X51.1
  Bottom 0.406: JP1X51.2 95.38,19.18 95.38,37.08 v94.36,38.1
P1X52  (via drill 0.6 pad 1.01)
  Top 0.406: v94.36,76.2 95.06,75.5 Q8X52.1
  Bottom 0.406: JP1X52.2 95.38,57.28 95.38,75.18 v94.36,76.2
P2X11  (via drill 0.6 pad 1.01)
  Top 0.406: v20.45,38.1 20.13,37.78 Q6X11.1
  Bottom 0.305: 20.32,17.78 20.32,20.32
  Bottom 0.406: JP1X11.4 20.32,17.78 | 20.32,20.32 23.37,23.37 23.37,35.31 v20.45,38.1
P2X12  (via drill 0.6 pad 1.01)
  Top 0.406: v20.45,76.2 20.13,75.88 Q6X12.1
  Bottom 0.305: 20.32,55.88 20.32,58.42
  Bottom 0.406: JP1X12.4 20.32,55.88 | 20.32,58.42 23.37,61.47 23.37,73.41 v20.45,76.2
P2X21  (via drill 0.6 pad 1.01)
  Top 0.406: v38.23,38.1 37.91,37.78 Q6X21.1
  Bottom 0.305: 38.1,17.78 38.1,20.32
  Bottom 0.406: JP1X21.4 38.1,17.78 | 38.1,20.32 41.15,23.37 41.15,35.31 v38.23,38.1
P2X22  (via drill 0.6 pad 1.01)
  Top 0.406: v38.23,76.2 37.91,75.88 Q6X22.1
  Bottom 0.305: 38.1,55.88 38.1,58.42
  Bottom 0.406: JP1X22.4 38.1,55.88 | 38.1,58.42 41.15,61.47 41.15,73.41 v38.23,76.2
P2X31  (via drill 0.6 pad 1.01)
  Top 0.406: v56.01,38.1 55.69,37.78 Q6X31.1
  Bottom 0.305: 55.88,17.78 55.88,20.32
  Bottom 0.406: JP1X31.4 55.88,17.78 | 55.88,20.32 58.93,23.37 58.93,35.31 v56.01,38.1
P2X32  (via drill 0.6 pad 1.01)
  Top 0.406: v56.01,76.2 55.69,75.88 Q6X32.1
  Bottom 0.305: 55.88,55.88 55.88,58.42
  Bottom 0.406: JP1X32.4 55.88,55.88 | 55.88,58.42 58.93,61.47 58.93,73.41 v56.01,76.2
P2X41  (via drill 0.6 pad 1.01)
  Top 0.406: v73.79,38.1 73.47,37.78 Q6X41.1
  Bottom 0.305: 73.66,17.78 73.66,20.32
  Bottom 0.406: JP1X41.4 73.66,17.78 | 73.66,20.32 76.71,23.37 76.71,35.31 v73.79,38.1
P2X42  (via drill 0.6 pad 1.01)
  Top 0.406: v73.79,76.2 73.47,75.88 Q6X42.1
  Bottom 0.305: 73.66,55.88 73.66,58.42
  Bottom 0.406: JP1X42.4 73.66,55.88 | 73.66,58.42 76.71,61.47 76.71,73.41 v73.79,76.2
P2X51  (via drill 0.6 pad 1.01)
  Top 0.406: v91.57,38.1 91.25,37.78 Q6X51.1
  Bottom 0.305: 91.44,17.78 91.44,20.32
  Bottom 0.406: JP1X51.4 91.44,17.78 | 91.44,20.32 94.49,23.37 94.49,35.31 v91.57,38.1
P2X52  (via drill 0.6 pad 1.01)
  Top 0.406: v91.57,76.2 91.25,75.88 Q6X52.1
  Bottom 0.305: 91.44,55.88 91.44,58.42
  Bottom 0.406: JP1X52.4 91.44,55.88 | 91.44,58.42 94.49,61.47 94.49,73.41 v91.57,76.2
P3X11  (via drill 0.6 pad 1.01)
  Top 0.406: v16,38.1 16.32,37.78 Q7X11.1
  Bottom 0.305: 12.7,17.78 12.7,20.32
  Bottom 0.406: JP1X11.8 12.7,17.78 | 12.7,20.32 9.65,23.37 9.65,35.56 10.29,36.2 12.83,36.2 14.73,38.1 v16,38.1
P3X12  (via drill 0.6 pad 1.01)
  Top 0.406: v16,76.2 16.32,75.89 Q7X12.1
  Bottom 0.305: 12.7,55.88 12.7,58.42
  Bottom 0.406: JP1X12.8 12.7,55.88 | 12.7,58.42 9.65,61.47 9.65,73.66 10.29,74.3 12.83,74.3 14.73,76.2 v16,76.2
P3X21  (via drill 0.6 pad 1.01)
  Top 0.406: v33.78,38.1 34.1,37.78 Q7X21.1
  Bottom 0.305: 30.48,17.78 30.48,20.32
  Bottom 0.406: JP1X21.8 30.48,17.78 | 30.48,20.32 27.43,23.37 27.43,35.56 28.07,36.2 30.61,36.2 32.51,38.1 v33.78,38.1
P3X22  (via drill 0.6 pad 1.01)
  Top 0.406: v33.78,76.2 34.1,75.89 Q7X22.1
  Bottom 0.305: 30.48,55.88 30.48,58.42
  Bottom 0.406: JP1X22.8 30.48,55.88 | 30.48,58.42 27.43,61.47 27.43,73.66 28.07,74.3 30.61,74.3 32.51,76.2 v33.78,76.2
P3X31  (via drill 0.6 pad 1.01)
  Top 0.406: v51.56,38.1 51.88,37.78 Q7X31.1
  Bottom 0.305: 48.26,17.78 48.26,20.32
  Bottom 0.406: JP1X31.8 48.26,17.78 | 48.26,20.32 45.21,23.37 45.21,35.56 45.85,36.2 48.39,36.2 50.29,38.1 v51.56,38.1
P3X32  (via drill 0.6 pad 1.01)
  Top 0.406: v51.56,76.2 51.88,75.89 Q7X32.1
  Bottom 0.305: 48.26,55.88 48.26,58.42
  Bottom 0.406: JP1X32.8 48.26,55.88 | 48.26,58.42 45.21,61.47 45.21,73.66 45.85,74.3 48.39,74.3 50.29,76.2 v51.56,76.2
P3X41  (via drill 0.6 pad 1.01)
  Top 0.406: v69.34,38.1 69.66,37.78 Q7X41.1
  Bottom 0.305: 66.04,17.78 66.04,20.32
  Bottom 0.406: JP1X41.8 66.04,17.78 | 66.04,20.32 62.99,23.37 62.99,35.56 63.63,36.2 66.17,36.2 68.07,38.1 v69.34,38.1
P3X42  (via drill 0.6 pad 1.01)
  Top 0.406: v69.34,76.2 69.66,75.89 Q7X42.1
  Bottom 0.305: 66.04,55.88 66.04,58.42
  Bottom 0.406: JP1X42.8 66.04,55.88 | 66.04,58.42 62.99,61.47 62.99,73.66 63.63,74.3 66.17,74.3 68.07,76.2 v69.34,76.2
P3X51  (via drill 0.6 pad 1.01)
  Top 0.406: v87.12,38.1 87.44,37.78 Q7X51.1
  Bottom 0.305: 83.82,17.78 83.82,20.32
  Bottom 0.406: JP1X51.8 83.82,17.78 | 83.82,20.32 80.77,23.37 80.77,35.56 81.41,36.2 83.95,36.2 85.85,38.1 v87.12,38.1
P3X52  (via drill 0.6 pad 1.01)
  Top 0.406: v87.12,76.2 87.44,75.89 Q7X52.1
  Bottom 0.305: 83.82,55.88 83.82,58.42
  Bottom 0.406: JP1X52.8 83.82,55.88 | 83.82,58.42 80.77,61.47 80.77,73.66 81.41,74.3 83.95,74.3 85.85,76.2 v87.12,76.2
P4X11  (via drill 0.6 pad 1.01)
  Top 0.406: v12.19,38.1 12.51,37.78 Q5X11.1
  Bottom 0.406: JP1X11.10 8.76,19.18 8.76,37.08 9.65,38.1 v12.19,38.1
P4X12  (via drill 0.6 pad 1.01)
  Top 0.406: v12.19,76.2 12.51,75.89 Q5X12.1
  Bottom 0.406: JP1X12.10 8.76,57.28 8.76,75.18 9.65,76.2 v12.19,76.2
P4X21  (via drill 0.6 pad 1.01)
  Top 0.406: v29.97,38.1 30.29,37.78 Q5X21.1
  Bottom 0.406: JP1X21.10 26.54,19.18 26.54,37.08 27.43,38.1 v29.97,38.1
P4X22  (via drill 0.6 pad 1.01)
  Top 0.406: v29.97,76.2 30.29,75.89 Q5X22.1
  Bottom 0.406: JP1X22.10 26.54,57.28 26.54,75.18 27.43,76.2 v29.97,76.2
P4X31  (via drill 0.6 pad 1.01)
  Top 0.406: v47.75,38.1 48.07,37.78 Q5X31.1
  Bottom 0.406: JP1X31.10 44.32,19.18 44.32,37.08 45.21,38.1 v47.75,38.1
P4X32  (via drill 0.6 pad 1.01)
  Top 0.406: v47.75,76.2 48.07,75.89 Q5X32.1
  Bottom 0.406: JP1X32.10 44.32,57.28 44.32,75.18 45.21,76.2 v47.75,76.2
P4X41  (via drill 0.6 pad 1.01)
  Top 0.406: v65.53,38.1 65.85,37.78 Q5X41.1
  Bottom 0.406: JP1X41.10 62.1,19.18 62.1,37.08 62.99,38.1 v65.53,38.1
P4X42  (via drill 0.6 pad 1.01)
  Top 0.406: v65.53,76.2 65.85,75.89 Q5X42.1
  Bottom 0.406: JP1X42.10 62.1,57.28 62.1,75.18 62.99,76.2 v65.53,76.2
P4X51  (via drill 0.6 pad 1.01)
  Top 0.406: v83.31,38.1 83.63,37.78 Q5X51.1
  Bottom 0.406: JP1X51.10 79.88,19.18 79.88,37.08 80.77,38.1 v83.31,38.1
P4X52  (via drill 0.6 pad 1.01)
  Top 0.406: v83.31,76.2 83.63,75.89 Q5X52.1
  Bottom 0.406: JP1X52.10 79.88,57.28 79.88,75.18 80.77,76.2 v83.31,76.2
VCCX11
  pour Top (isolate 0.305): 8,13.08 8,50.42 25.02,50.42 25.02,13.08
VCCX12
  pour Top (isolate 0.305): 8,51.18 8,88.52 25.02,88.52 25.02,51.18
VCCX21
  pour Top (isolate 0.305): 25.78,13.08 25.78,50.42 42.8,50.42 42.8,13.08
VCCX22
  pour Top (isolate 0.305): 25.78,51.18 25.78,88.52 42.8,88.52 42.8,51.18
VCCX31
  pour Top (isolate 0.305): 43.56,13.08 43.56,50.42 60.58,50.42 60.58,13.08
VCCX32
  pour Top (isolate 0.305): 43.56,51.18 43.56,88.52 60.58,88.52 60.58,51.18
VCCX41
  pour Top (isolate 0.305): 61.34,13.08 61.34,50.42 78.36,50.42 78.36,13.08
VCCX42
  pour Top (isolate 0.305): 61.34,51.18 61.34,88.52 78.36,88.52 78.36,51.18
VCCX51
  pour Top (isolate 0.305): 79.12,13.08 79.12,50.42 96.14,50.42 96.14,13.08
VCCX52
  pour Top (isolate 0.305): 79.12,51.18 79.12,88.52 96.14,88.52 96.14,51.18

## Text on the board
tPlace: Open Drain Output | v1.0 | v1.0 | v1.0 | v1.0 | v1.0 | v1.0 | Open Drain / Output | Open Drain / Output | Open Drain / Output | Open Drain / Output | Open Drain / Output | v1.0 | v1.0 | v1.0 | v1.0 | v1.0 | Open Drain / Output | Open Drain / Output | Open Drain / Output | Open Drain / Output | Open Drain / Output
bPlace: Open Drain Output | Open Drain Output | Open Drain Output | Open Drain Output | Open Drain Output | www.SPCoast.com | 2020.09 | www.SPCoast.com | 2020.09 | www.SPCoast.com | 2020.09 | www.SPCoast.com | 2020.09 | www.SPCoast.com | 2020.09 | John Plocher | v1.0 | John Plocher | v1.0 | John Plocher | v1.0 | John Plocher | v1.0 | John Plocher | v1.0 | Model RR ing is fun!' | Made in the PCR, / Coast Div, NMRA | Model RR ing is fun!' | Made in the PCR, / Coast Div, NMRA | Model RR ing is fun!' | Made in the PCR, / Coast Div, NMRA | Model RR ing is fun!' | Made in the PCR, / Coast Div, NMRA | Model RR ing is fun!' | Made in the PCR, / Coast Div, NMRA | Open Drain Output | Open Drain Output | Open Drain Output | Open Drain Output | Open Drain Output | www.SPCoast.com | 2020.09 | www.SPCoast.com | 2020.09 | www.SPCoast.com | 2020.09 | www.SPCoast.com | 2020.09 | www.SPCoast.com | 2020.09 | John Plocher | v1.0 | John Plocher | v1.0 | John Plocher | v1.0 | John Plocher | v1.0 | John Plocher | v1.0 | Model RR ing is fun!' | Made in the PCR, / Coast Div, NMRA | Model RR ing is fun!' | Made in the PCR, / Coast Div, NMRA | Model RR ing is fun!' | Made in the PCR, / Coast Div, NMRA | Model RR ing is fun!' | Made in the PCR, / Coast Div, NMRA | Model RR ing is fun!' | Made in the PCR, / Coast Div, NMRA
Document: Black | Black | Black | Black | Black | Black | Black | Black | Black | Black
_tNames: Q5 | Q7 | Q6 | Q8 | Q5 | Q7 | Q6 | Q8 | Q5 | Q7 | Q6 | Q8 | Q5 | Q7 | Q6 | Q8 | Q5 | Q7 | Q6 | Q8 | R1 | R2 | R3 | R4 | R1 | R2 | R3 | R4 | R1 | R2 | R3 | R4 | R1 | R2 | R3 | R4 | R1 | R2 | R3 | R4 | Q1 | Q2 | Q3 | Q4 | Q1 | Q2 | Q3 | Q4 | Q1 | Q2 | Q3 | Q4 | Q1 | Q2 | Q3 | Q4 | Q1 | Q2 | Q3 | Q4 | JP1 | JP1 | JP1 | JP1 | JP1 | Q5 | Q7 | Q6 | Q8 | Q5 | Q7 | Q6 | Q8 | Q5 | Q7 | Q6 | Q8 | Q5 | Q7 | Q6 | Q8 | Q5 | Q7 | Q6 | Q8 | R1 | R2 | R3 | R4 | R1 | R2 | R3 | R4 | R1 | R2 | R3 | R4 | R1 | R2 | R3 | R4 | R1 | R2 | R3 | R4 | Q1 | Q2 | Q3 | Q4 | Q1 | Q2 | Q3 | Q4 | Q1 | Q2 | Q3 | Q4 | Q1 | Q2 | Q3 | Q4 | Q1 | Q2 | Q3 | Q4 | JP1 | JP1 | JP1 | JP1 | JP1